# Altium PCB EE311_Example_Boost_PCB.PcbDoc
Units mm, origin at the board's own origin, x right, y up, seen from the top; angles counter-clockwise.
Board outline 52.17 x 39.37 mm, 2 copper layers (Top Layer, Bottom Layer); 43 components, 16 nets, 108 pads, 28 vias.
Unrouted connection lines stored in the file: 1.
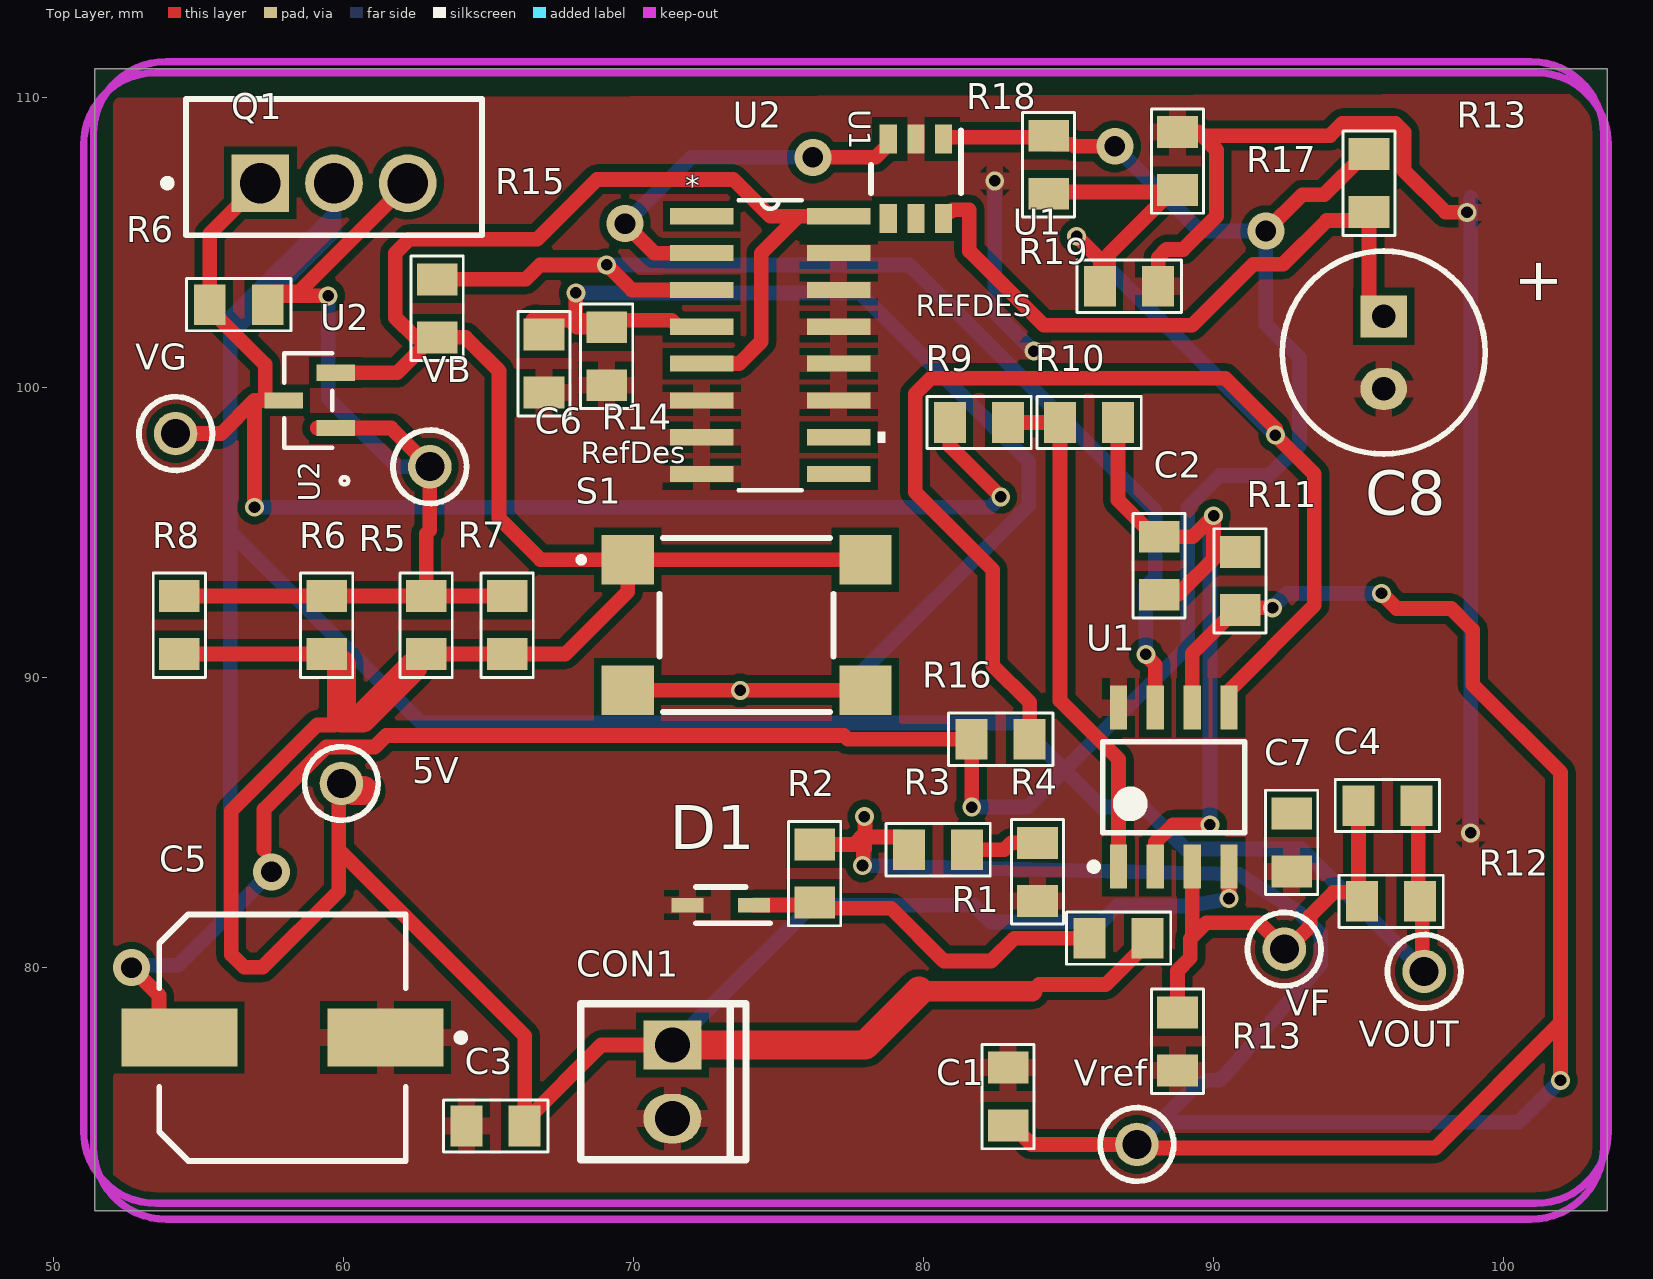
[diagram p0: Top Layer view]
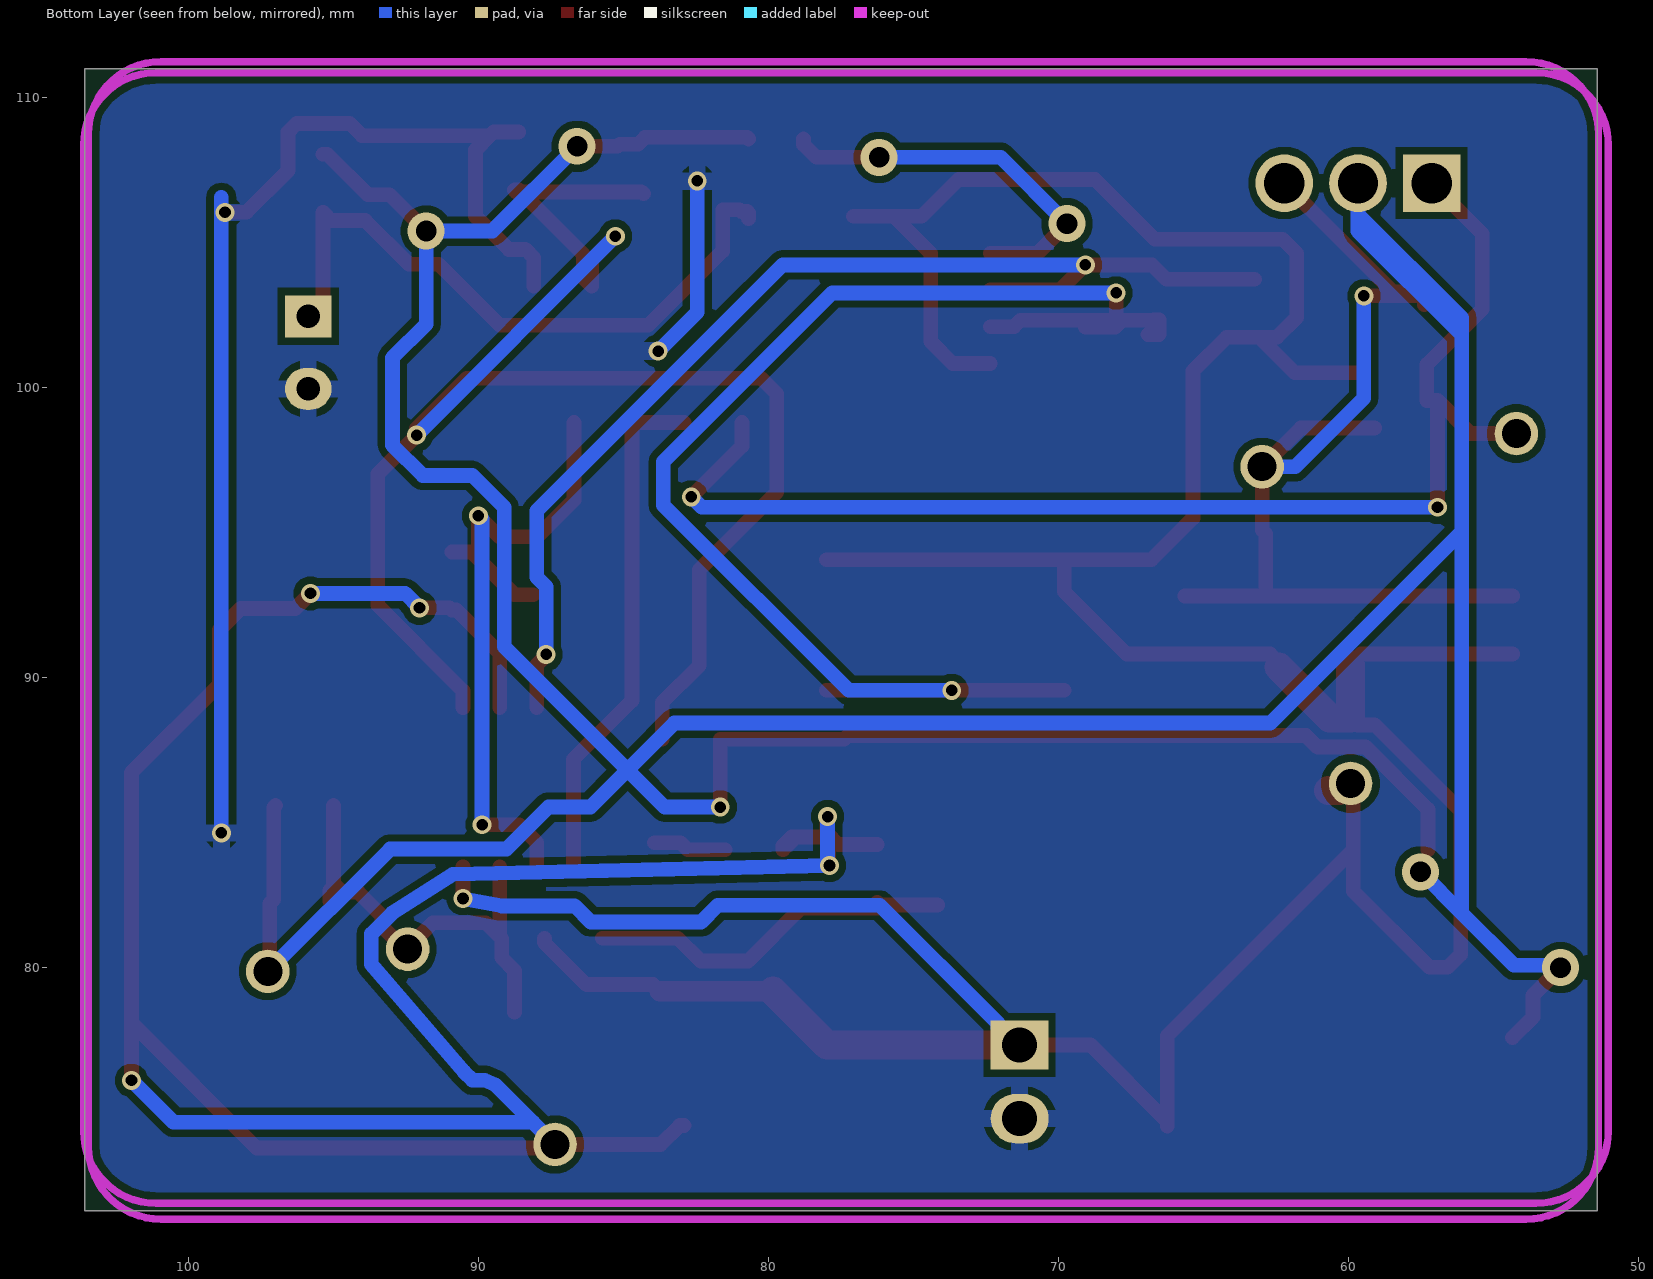
[diagram p1: Bottom Layer view, seen from below]

## Layer stack, top to bottom
Top Solder: solder mask 0.0102, Solder Resist, Dk 3.5
Top Layer: signal copper 0.0356
Dielectric 1: dielectric 0.32, FR-4, Dk 4.8
Bottom Layer: signal copper 0.0356
Bottom Solder: solder mask 0.0102, Solder Resist, Dk 3.5

## Board outline
51.435,71.628 51.435,110.998 103.6,110.998 103.6,71.628

## Design rules (kind name [scope] priority, off if disabled: settings)
BoardOutlineClearance [All] p1: gap=0.3 ignorepadtopadclearanceinfootprint=FALSE except(0.4: Arc-SplitBarrior Arc-SplitContinuation Track-SplitBarrior Track-SplitContinuation SMDPad-SplitBarrior SMDPad-SplitContinuation THPad-SplitBarrior THPad-SplitContinuation Via-SplitBarrior Via-SplitContinuation Fill-SplitBarrior Fill-SplitContinuation Poly-SplitBarrior Poly-SplitContinuation Region-SplitBarrior Region-SplitContinuation Text-SplitBarrior Text-SplitContinuation)
Clearance Clearance_1 [All] p1: gap=0.254 ignorepadtopadclearanceinfootprint=FALSE
Clearance [All] p2: gap=0.381 ignorepadtopadclearanceinfootprint=TRUE
Height [All] p1: minheight=0 maxheight=50 prefheight=12.7
HoleSize [All] p1: absolutevalues=TRUE maxlimit=12 minlimit=0.25 maxpercent=80.000 minpercent=20.000
MinimumAnnularRing [All] p1: minimumring=0.13
MinimumSolderMaskSliver [All] p1: minsoldermaskwidth=0.1
PolygonConnect PolygonConnect_RShunt [InComponent('R5')] p1: connectstyle=Direct reliefconductorwidth=0.508 reliefentries=4 polygonreliefangle="90 Angle" airgapwidth=0.254
PolygonConnect [All] p2: connectstyle=Relief reliefconductorwidth=0.6 reliefentries=4 polygonreliefangle="90 Angle" airgapwidth=0.254
RoutingCorners [All] p1: cornerstyle=Round minsetback=2.54 maxsetback=2.54
RoutingVias [All] p1: holewidth=0.4 width=0.65 viastyle="Through Hole" minholewidth=0.25 minwidth=0.4 maxholewidth=1 maxwidth=2
SilkToSilkClearance [All] p1: silktosilkclearance=0.1
SilkToSolderMaskClearance [IsPad] p1: minsilkscreentomaskgap=0.1 clearancetoexposedcopper=TRUE
SolderMaskExpansion [All] p1: expansion=0.102 istentingtop=FALSE
SupplyNets "Schematic Supply Nets_8" [InNet('VOUT')] p1: voltage=0.000
SupplyNets "Schematic Supply Nets_7" [InNet('Verror')] p2: voltage=0.000
SupplyNets "Schematic Supply Nets_4" [InNet('Von')] p3: voltage=0.000
SupplyNets "Schematic Supply Nets_2" [InNet('Vref1.75')] p4: voltage=0.000
SupplyNets "Schematic Supply Nets_1" [InNet('VOOp')] p5: voltage=0.000
SupplyNets "Schematic Supply Nets_3" [InNet('GND')] p6: voltage=0.000
SupplyNets "Schematic Supply Nets" [InNet('5V')] p7: voltage=0.000
Width [All] p1: maxlimit=10.16 minlimit=0.127 preferedwidth=0.508
24 further rules are at their usual default settings.

## Classes and differential pairs
component class EE311_Example_Boost_Sch: 5V C1 C2 C3 C4 C5 C6 C7 C8 CON1 D1 Q1 R1 R2 R3 R4 R5 R6 R7 R8 R9 R10 R11 R12 R13 R14 R15 R16 R17 R18 R19 S1 U1 U2 VB VF VG VOUT Vref

## Components (designator, comment, footprint, x,y, rotation, side; value= is the part's Value field where it differs from the comment)
5V "5003" TP_TH 59.944,86.36 r0 top
C1 "0.0000000033" "0805 CAP"#1 82.931,75.565 r270 top
C2 "0.0000000033" "0805 CAP"#2 88.138,93.869 r270 top
C3 "0.0000000033" "0805 CAP"#3 65.262,74.549 r0 top
C4 "0.00000033" "0805 CAP"#2 96.012,85.598 r180 top
C5 "EEE-FK1K330P" FP-FKF-MFG 57.912,77.597 r180 top value=33µF
C6 "0.0001" "0805 CAP"#2 66.929,100.838 r270 top
C7 "0.000001" "0805 CAP"#2 92.71,84.328 r90 top
C8 "*" "CAP-RAD-2.5mm Pitch" 95.885,101.219 r270 top
CON1 "HDR2X1" HDR2X1_2P54 71.357,77.343 r0 top
D1 "BZT52C3V3S-TP" SOD2512X115N 73.025,82.169 r180 top
Q1 "IRF4905" IFX-PG-TO220-3-904-1 59.69,107.061 r0 top
R1 "330" "0805 RES" 86.741,81.026 r0 top
R2 "3900" "0805 RES" 76.262,83.254 r90 top
R3 "3300" "0805 RES" 80.518,84.074 r0 top
R4 "1100" "0805 RES" 83.947,83.312 r270 top
R5 "1.8" "0805 RES" 62.865,91.821 r90 top
R6 "100000" "0805 RES" 56.404,102.87 r180 top
R6 "2.2" "0805 RES" 59.436,91.821 r90 top
R7 "100" "0805 RES" 65.659,91.821 r90 top
R8 "100" "0805 RES" 54.356,91.821 r90 top
R9 "1200" "0805 RES" 81.931,98.806 r0 top
R10 "10000" "0805 RES" 85.725,98.806 r180 top
R11 "1200" "0805 RES" 90.932,93.345 r270 top
R12 "1000" "0805 RES" 96.139,82.296 r0 top
R13 "2" "0805 RES" 95.377,107.061 r270 top
R13 "1000" "0805 RES" 88.773,77.47 r90 top
R14 "1000" "0805 RES" 69.088,101.092 r90 top
R15 "1000" "0805 RES" 63.246,102.743 r90 top
R16 "1000" "0805 RES" 82.677,87.884 r0 top
R17 "1000" "0805 RES" 88.773,107.823 r270 top
R18 "1000" "0805 RES" 84.328,107.696 r270 top
R19 "1000" "0805 RES" 87.106,103.505 r0 top
S1 "SWT0315-065025GSA_REVA" SW_SWT0315-065025GSA_REVA 73.914,91.821 r0 top
U1 "LM358DR2G" ONSC-SOIC-8-751-07_V 88.646,86.233 r90 top
U1 "TPS22917DBVR" DBV0006_N 79.756,107.21 r270 top
U2 "CD4043BDR" D16 74.727,101.473 r0 top
U2 "BC807-40,215" SOT23_NEX 58.801,99.568 r90 top
VB "5003" TP_TH 62.992,97.282 r0 top
VF "5003" TP_TH 92.456,80.645 r0 top
VG "5003" TP_TH 54.229,98.425 r0 top
VOUT "5003" TP_TH 97.282,79.883 r90 top
Vref "5003" TP_TH 87.376,73.914 r90 top

## Footprints (in the part's own frame and the unit in brackets; to place one, negate y for a bottom-side part, rotate by r counter-clockwise, add the part's x,y. Pads: shape width x height; smd on the part's side, far side on the other; paste and mask are expansions set on the pad)
"0805 CAP"#1 [mm] "http://www.digikey.co.nz/Web%20Export/Supplier%20Content/Vishay_8026/PDF/VishayBeyschlag_SolderPad.pdf?redirected=1 with dimension G modified by +0.25mm"
  rect 1.1x1.4 smd paste+0 mask+0.102: 1(-1,0)
  rect 1.1x1.4 smd: 2(1,0)
  silkscreen extent -1.8,-0.9 1.8,0.9, body extent -1.04,-0.66 1.04,0.66, height 0.61
"0805 CAP"#2 [mm] "http://www.digikey.co.nz/Web%20Export/Supplier%20Content/Vishay_8026/PDF/VishayBeyschlag_SolderPad.pdf?redirected=1 with dimension G modified by +0.25mm"
  rect 1.1x1.4 smd: 1(-1,0) 2(1,0)
  silkscreen extent -1.8,-0.9 1.8,0.9, body extent -1.04,-0.66 1.04,0.66, height 0.61
"0805 CAP"#3 [mm] "http://www.digikey.co.nz/Web%20Export/Supplier%20Content/Vishay_8026/PDF/VishayBeyschlag_SolderPad.pdf?redirected=1 with dimension G modified by +0.25mm"
  rect 1.1x1.4 smd: 1(-1,0)
  rect 1.1x1.4 smd paste+0 mask+0.102: 2(1,0)
  silkscreen extent -1.8,-0.9 1.8,0.9, body extent -1.04,-0.66 1.04,0.66, height 0.61
"0805 RES" [mm] "http://www.digikey.co.nz/Web%20Export/Supplier%20Content/Vishay_8026/PDF/VishayBeyschlag_SolderPad.pdf?redirected=1 with dimension G modified by +0.25mm"
  rect 1.1x1.4 smd: 1(-1,0) 2(1,0)
  silkscreen extent -1.8,-0.9 1.8,0.9, body extent -1.04,-0.66 1.04,0.66, height 0.61
"CAP-RAD-2.5mm Pitch" [mm] "Cap 6.3 X 11.2"
  rect 1.45x1.6 hole 0.8: 1(-1.25,0)
  oval 1.45x1.6 hole 0.8: 2(1.25,0)
  silkscreen extent -3.5,-3.5 3.5,3.5, body extent -3.15,-3.15 3.15,3.15, height 11.5
D16 [mil]
  rect 86x22 smd: 1(-93,175) 2(-93,125) 3(-93,75) 4(-93,25) 5(-93,-25) 6(-93,-75) 7(-93,-125) 8(-93,-175) 9(93,-175) 10(93,-125) 11(93,-75) 12(93,-25) 13(93,25) 14(93,75) 15(93,125) 16(93,175)
  silkscreen extent -43,-197 156,197, body extent -122,-197 122,197, height 69
DBV0006_N [mm]
  rect 1x0.6 smd paste+0 mask+0: 1(-1.375,0.95) 2(-1.375,0) 3(-1.375,-0.95) 4(1.375,-0.95) 5(1.375,0) 6(1.375,0.95)
  silkscreen extent -1.67,-1.55 0.5,1.55
FP-FKF-MFG [mm]
  rect 4x2 smd paste+0 mask+0: 1(-3.55,0) 2(3.55,0)
  silkscreen extent -6.28,-4.25 4.25,4.25, body extent -5.8,-4.5 5.8,4.5, height 0.25
HDR2X1_2P54 [mm]
  rect 2x1.7 hole 1.2: 1(0,0)
  oval 2x1.7 hole 1.2: 2(0,-2.54)
  silkscreen extent -3.16,-3.96 2.54,1.42, body extent -3.3,-3.64 3.18,1.44, height 10.09
IFX-PG-TO220-3-904-1 [mm] "TO,flange mount,2.54 mm pitch, 3 pin, 10.16 mm L X 4.57 mm W X 20.56 mm H body"
  rect 1.99x1.99 hole 1.39 paste-2539.97 mask+0: 1(-2.54,0)
  round 1.99 hole 1.39 paste-2539.97 mask+0: 2(0,0) 3(2.54,0)
  silkscreen extent -5.87,-1.8 5.1,2.9, body extent -5.16,-1.72 5.16,2.86, height 19.84
ONSC-SOIC-8-751-07_V [mm] "SOIC, 8-Leads, Body 4.9x3.9mm, Pitch 1.27mm"
  rect 1.52x0.6 smd: 1(-2.74,1.905) 2(-2.74,0.635) 3(-2.74,-0.635) 4(-2.74,-1.905) 5(2.74,-1.905) 6(2.74,-0.635) 7(2.74,0.635) 8(2.74,1.905)
  silkscreen extent -2.86,-2.45 1.57,2.88, body extent -3,-2.5 3,2.5, height 1.75
SOD2512X115N [mm]
  rect 1.1x0.5 smd: 1(-1.15,0) 2(1.15,0)
  silkscreen extent -1.7,-0.63 0.85,0.63
SOT23_NEX [mil]
  rect 22x52 smd paste+3.86 mask+4: 1(-37.5,-37.21) 2(37.5,-37.21) 3(0,33.36)
  silkscreen extent -114,-54 64,33, body extent -59,-49 59,49, height 43
SW_SWT0315-065025GSA_REVA [mm]
  rect 1.8x1.7 smd paste+0 mask+0.102: 1(-4.1,2.25) 2(4.1,2.25) 3(-4.1,-2.25) 4(4.1,-2.25)
  silkscreen extent -5.8,-3 3,3
TP_TH [mm] "Test Point, Through Hole, Dia 2.54mm"
  round 1.5 hole 1: 1(0,0)
  silkscreen extent -1.27,-1.27 1.27,1.27, body extent -1.27,-1.27 1.27,1.27, height 4.57

## Part data
5V VB VF VG VOUT Vref: library part TestPoint, "Test Point, Orange, 1-Pin THD, RoHS", Forward Current="3 A", Forward Voltage="1.08 V", Max Operating Temperature="150 degC", Max Surge Current="80 A", Min Operating Temperature="-65 degC", Package Quantity=500, Peak Reverse Current="600 uA", ComponentLink1Description="Manufacturer URL", ComponentLink1URL=http://www.keyelco.com/, ComponentLink2Description=Datasheet, ComponentLink2URL=http://keyelco.com/userAssets/file/M65p56.pdf, DatasheetVersion=Jun-15, Diameter="5.3 mm", Height="0.25 inch", Length="9.5 mm", Mount="Through Hole", PackageDescription="1-Pin Through Hole Device, Dia 2.54 mm", PackageReference=5003, Packaging=Bulk, Pins=2, Radiation Hardening=No, REACH SVHC="No SVHC", RoHSCompliant=true, Weight="0.01 lb", Width="0.25 inch"
C1 C2 C3 C4 C6 C7: library part CerCap_SMT_0805, "SMT ceramic capacitor 0805 size"
C5: library part CMP-001-00000-1, "Aluminum Electrolytic Capacitor, Polarized, Aluminum (wet), 80V, 20% +Tol, 20% -Tol, 33uF, Surface Mount, 3333", Capacitor Type=Aluminium, Case/Package=3333, Manufacturer=Panasonic, Max Operating Temperature=105°C, Min Operating Temperature=-55°C, Component Type=Capacitors, Dielectric Material=Aluminium, Height=10.2mm, Manufacturer Part Number=EEE-FK1K330P, Mounting Technology="Surface Mount", Pins=2, RoHS Compliant=Yes
C8: library part ElecCap_TH_2P0, "Electrolytic capacitor with radial package, 2mm pitch and 5.2mm diameter", LatestRevisionDate=17-Jul-2002, LatestRevisionNote="Re-released for DXP Platform.", PackageDescription="Polarized Capacitor; 2 Leads", PackageReference=POLAR0.8, Published=8-Jun-2000, Publisher="Altium Limited"
CON1: library part CMP-004-000000-7, "Header 2X1", Component Type=Connectors, Design Item ID=HDR2X1, Source=CommonSymbols_V1.SchLib
D1: "Zener Diodes", Manufacturer_Name=MCC, Mouser Part Number=833-BZT52C3V3S-TP, Datasheet Link=https://mccsemi.com/pdf/Products/BZT52C2V0S-BZT52C56S(200mW)(SOD-323).pdf, Geometry.Height=1.15mm, Manufacturer_Part_Number=BZT52C3V3S-TP, Mouser Price/Stock=https://www.mouser.co.uk/ProductDetail/Micro-Commercial-Components-MCC/BZT52C3V3S-TP?qs=ZNK0BnemlqG8WPvv%2FxVbdg%3D%3D
Q1: "OptiMOS - P2 Power-Transistor, P-channel-Enhancement mode, VDS -30V", Manufacturer="Infineon Technologies", Manufacturer Order NumberManufacturer Order Number=IRF4905, PackageReference=PG-TO220-3-904
R1 R2 R3 R4 R5 R6 R6 R7 R8 R9 R10 R11 R12 R13 R13 R14 R15 R16 R17 R18 R19: library part Res_SMT_0805, "0805 resistor", ComponentLink1Description=https://nz.mouser.com/datasheet/2/315/AOA0000C304-1149620.pdf, LatestRevisionDate=17-Jul-2002, LatestRevisionNote="Re-released for DXP Platform.", PackageReference=AXIAL-0.4, Published=8-Jun-2000, Publisher="Altium Limited"
S1: "6mm x 6mm Gull Wing Tactile Switch", Package=None, Check_prices=https://www.snapeda.com/parts/SWT0315-065025GSA/Global+Connector+Technology/view-part/?ref=eda, MF="Global Connector Technology", MP=SWT0315-065025GSA, SnapEDA_Link=https://www.snapeda.com/parts/SWT0315-065025GSA/Global+Connector+Technology/view-part/?ref=snap
U1: library part CMP-014-00017-2, "Single Supply Dual Operational Amplifier, 3 to 32 V, 0 to 70 degC, 8-Pin SOIC, Pb-Free, Tape and Reel", Case/Package=SOIC, Manufacturer="ON Semiconductor", Max Dual Supply Voltage=16V, Max Input Voltage=28.3V, Max Operating Temperature=70°C, Max Supply Voltage=44V, Min Dual Supply Voltage=1.5V, Min Input Voltage=0uV, Min Operating Temperature=0°C, Min Supply Voltage=2.3V, Nominal Dual Supply Voltage=12V, Nominal Supply Current=35uA, Nominal Voltage Gain=100dB, Output Current=40mA, Package Description="8-Pin Small Outline Integrated Circuit, Body 4.9 x 3.9 mm, Pitch 1.27 mm", Package Quantity=2500, Package Reference=SOIC-8-751-07, Channels=2, Common Mode Rejection Ratio=65dB, Datasheet URL=http://www.onsemi.cn/pub_link/Collateral/LM358-D.PDF, Datasheet Version="Rev. 32, 10/2016", Manufacturer URL=http://www.onsemi.com/, Mounting Technology=SM, Nominal Gain Bandwith Product=200KHz, Nominal Supply Voltage=12V, Packaging=TapeandReel, Pins=8, RoHS Compliant=True, Slew Rate=0.07V/us
U1: "5.5-V, 2-A, 80-mÎ© , 10-nA leakage load switch adj. rise time and adj output discharge 6-SOT-23 -40 to 125", Manufacturer_Name="Texas Instruments", Copyright="Copyright (C) 2026 Ultra Librarian. All rights reserved.", Manufacturer_Part_Number=TPS22917DBVR, RefDes=RefDes, Type=TYPE
U2: "CMOS Quad NOR R/S Latch with 3-State Outputs 16-SOIC -55 to 125", Manufacturer_Name="Texas Instruments", Copyright="Copyright (C) 2025 Ultra Librarian. All rights reserved.", Manufacturer_Part_Number=CD4043BDR, RefDes=RefDes, Type=Type
U2: "Description", Manufacturer_Name=Nexperia, Copyright="Copyright (C) 2026 Ultra Librarian. All rights reserved.", Manufacturer_Part_Number=BC807-40,215

## Via types
v1: diameter 0.65, hole 0.4, Top Layer to Bottom Layer, 21 vias
v2: diameter 1.27, hole 0.711, Top Layer to Bottom Layer, 6 vias
v3: diameter 0.65, hole 0.4, Top Layer to Bottom Layer, tented top, 1 vias

## Nets (pads, with @x,y where several pads share a name; then routed paths per layer and width w, separated by ;. In a path a pad name is that pad's centre, name@x,y a point inside that pad or via, vN(x,y) a via of type N, cw(c..) or ccw(c..) an arc to the next point about the centre after c; other vN are vias at no path point)
5V: 5V.1 C3.2 CON1.1 R1.2 R5.1 R6.1@59.436,90.821 R7.1 R8.1 R15.1 S1.1 S1.2 U1.4@90.551,83.493 U2.2@59.746,100.52 U2.5 U2.16 | length 152.2
  Top Layer w0.508: R8.1 59.436,90.821 59.586,90.821 R6.1@59.944,90.463 ; U2.2@59.746,100.52 61.873,100.52 R15.1@63.096,101.743 ; 5V.1 59.848,86.264 59.848,86.11 59.848,84.074 ; 59.944,88.626 59.698,88.38 59.107,88.38 56.144,85.417 56.144,80.467 56.591,80.02 57.222,80.02 59.848,82.647 59.848,84.074 ; R5.1@62.419,90.375 62.419,90.525 62.715,90.821 R5.1 R7.1 67.666,90.821 69.814,92.969 S1.1 ; C3.2 66.262,77.66 59.848,84.074 ; C3.2@66.262,74.699 68.906,77.343 CON1.1 ; U2.5 73.66,100.838 74.422,101.6 74.422,104.648 75.692,105.918 ; U2.16 75.692,105.918 ; S1.2 S1.1 ; 83.769,79.197 83.998,79.426 86.293,79.426 87.741,80.874 R1.2 ; v1(90.551,82.393) U1.4@90.551,83.493 ; R15.1@63.096,101.743 R15.1 64.221,101.743 65.38,100.584 65.38,95.504 66.813,94.071 S1.1 ; R15.1@63.096,101.743 62.484,101.743 61.798,102.429 61.798,104.648 62.28,105.13 66.7,105.13 68.758,107.188 73.457,107.188 74.727,105.918 75.692,105.918
  Top Layer w0.7: 79.858,79.197 83.769,79.197
  Top Layer w1: 5V.1 60.079,86.36 60.329,86.11 60.702,86.11 ; R6.1@59.944,90.463 59.944,88.626 60.67,88.626 R5.1@62.419,90.375 ; CON1.1 78.003,77.343 79.858,79.197
  Bottom Layer w0.508: CON1.1 71.507,77.343 72.103,77.939 72.103,78.089 76.177,82.164 81.76,82.164 82.339,81.585 86.149,81.585 86.703,82.139 89.217,82.139 v1(90.551,82.393)
GND: C1.1 C3.1 C5.1 C6.2 C7.1 C8.2 CON1.2 D1.2 R4.2 R13.1@88.773,76.47 R14.1 R17.1 R19.2 U1.2@79.756,108.585 U1.8 U2.6 U2.7 U2.8 U2.11 U2.12 U2.13 U2.14 U2.15 | length 47.3
  Top Layer w0.508: R19.2 88.106,104.489 88.392,104.775 88.976,104.775 90.119,105.918 90.119,108.204 89.627,108.696 ; R17.1@88.623,108.823 R17.1 89.5,108.823 89.627,108.696 ; v1(98.755,106.054) 98.019,106.054 96.585,107.488 96.585,108.821 96.287,109.119 94.452,109.119 94.029,108.696 89.627,108.696
  Bottom Layer w0.508: v1(82.474,107.137) 82.474,102.616 v1(83.82,101.27) ; v1(98.882,84.658) 98.882,106.562
NetC2_1: C2.1 C2.2 R10.1 R11.1 U1.2@88.011,83.493 | length 25.3
  Top Layer w0.508: R10.1 86.725,96.132 87.988,94.869 C2.1 89.297,94.869 v1(90.018,95.59) 90.018,94.345 ; U1.2@88.011,83.493 88.011,84.328 88.621,84.938 v1(89.891,84.938) ; C2.2 88.773,92.869 90.138,94.234 90.018,94.234 90.018,94.345 ; R11.1 90.018,94.345
  Bottom Layer w0.508: v1(89.891,84.938) v1@89.891,95.479
NetC4_2: C4.2 R12.1 R13.2@88.773,78.47 U1.3@89.281,83.493 VF.1 | length 16.1
  Top Layer w0.508: R13.2@88.773,78.47 88.773,79.907 89.216,80.35 89.216,81.008 89.281,81.073 ; U1.3@89.281,83.493 89.281,81.073 ; C4.2 R12.1@95.012,82.908 ; R12.1 95.139,82.677 95.012,82.804 R12.1@95.012,82.908 ; 89.281,81.073 89.47,81.262 89.768,81.56 91.588,81.56 92.456,80.692 VF.1 92.551,80.645 93.345,81.439 93.345,81.802 94.155,82.612 94.716,82.612 R12.1@95.012,82.908
NetC6_1: C6.1 R14.2 S1.3 S1.4 U2.4 | length 49.4
  Top Layer w0.508: C6.1 66.548,101.838 66.548,102.346 66.751,102.346 66.751,102.33 67.818,102.33 ; v1(68.028,103.276) 68.028,102.33 ; R14.2 68.056,102.092 67.818,102.33 ; S1.3 v1(73.696,89.571) S1.4 ; U2.4 71.552,102.108 71.33,102.33 68.028,102.33 ; 67.818,102.33 68.028,102.33
  Bottom Layer w0.508: v1(68.028,103.276) 77.815,103.276 83.642,97.449 83.642,95.961 77.252,89.571 v1(73.696,89.571)
NetC8_1: C8.1 R13.2@95.377,106.061 U1.6@80.706,105.835 | length 22.8
  Top Layer w0.508: U1.6@80.706,105.835 80.706,106.035 80.752,106.081 80.952,106.081 81.014,106.143 81.595,106.143 81.595,104.724 82.28,104.039 84.16,102.159 89.281,102.159 91.389,104.267 92.411,104.267 93.915,105.771 95.087,105.771 95.377,106.061 95.377,102.94 95.848,102.469 C8.1
NetD1_1: D1.1 R1.1 R2.1 | length 12.7
  Top Layer w0.508: D1.1 74.179,82.173 76.181,82.173 R2.1 ; R2.1@76.262,82.058 78.902,82.058 80.72,80.239 82.356,80.239 83.142,81.026 R1.1
NetQ1_3: Q1.3 R5.2 R6.1@57.404,102.87 R6.2@59.436,92.821 R7.2 R8.2 U2.1@59.746,98.615 VB.1 | length 37.2
  Top Layer w0.508: R8.2 59.436,92.821 R5.2 ; R6.1@57.404,102.87 R6.1@57.404,103.02 ; U2.1@59.111,98.615 59.746,98.615 61.658,98.615 VB.1 62.992,95.098 62.865,94.971 R5.2 ; v1(59.487,103.175) R6.1@57.559,103.175 ; Q1.3 58.485,103.316 57.7,103.316 R6.1@57.559,103.175 ; R7.2 R5.2 ; R6.1@57.404,103.02 R6.1@57.559,103.175 ; R6.1@57.404,103.02 57.404,103.175 R6.1@57.559,103.175
  Bottom Layer w0.508: v1(59.487,103.175) 59.487,99.644 61.849,97.282 VB.1
NetR3_2: R3.2 R4.1 | length 2.5
  Top Layer w0.508: R3.2 82.804,84.074 83.042,84.312 R4.1
NetR9_2: R9.2 R10.2 U1.1@86.741,83.493 | length 17.6
  Top Layer w0.508: R9.2 R10.2@84.379,98.806 ; R10.2 84.725,89.211 86.741,87.195 U1.1@86.741,83.493
NetR16_2: R16.2 R17.2 R18.2 R19.1 U1.5@90.551,88.973 | length 59.1
  Top Layer w0.508: R16.2 83.677,89.154 82.407,90.424 82.407,93.729 79.731,96.406 79.731,99.797 80.264,100.33 90.424,100.33 92.151,98.603 v1(92.151,98.374) 93.493,97.032 93.493,92.503 90.551,89.56 U1.5@90.551,88.973 ; R18.2 84.391,106.76 R17.2@88.559,106.76 ; v1(85.293,105.232) 86.106,104.419 R19.1 86.402,103.801 86.402,104.602 R17.2@88.559,106.76 ; R17.2@88.559,106.76 88.623,106.823 R17.2 88.709,106.76 R17.2@88.559,106.76
  Bottom Layer w0.508: v1(85.293,105.232) v1(92.151,98.374)
Verror: R15.2 U1.7 U2.3@72.365,103.378 | length 39.2
  Top Layer w0.508: R15.2 66.295,103.743 66.793,104.241 v1(69.088,104.241) 69.952,103.378 U2.3@72.365,103.378 ; v1(87.683,90.813) 87.683,90.778 88.011,90.45 U1.7
  Bottom Layer w0.508: v1(69.088,104.241) 79.527,104.242 88.011,95.758 88.011,93.469 87.683,93.141 v1(87.683,90.813)
Von: U1.3@78.806,108.585 U2.2@72.365,104.648 | length 13.5
  Top Layer w0.508: v2(69.723,105.664) 70.739,104.648 U2.2@72.365,104.648 ; v2(76.2,107.95) 78.371,107.95 78.806,108.385 U1.3@78.806,108.585
  Bottom Layer w0.508: v2(69.723,105.664) 72.009,107.95 v2(76.2,107.95)
VOOp: Q1.1 R6.2@55.404,102.87 R9.1 U2.3@57.954,99.568 VG.1 | length 45.4
  Top Layer w0.508: VG.1 55.795,98.425 56.938,99.568 56.947,99.568 ; v1(56.947,95.885) 56.947,99.568 ; Q1.1 55.404,105.315 55.404,102.87 55.404,102.72 57.319,100.805 57.319,99.568 56.947,99.568 ; R9.1 80.931,97.987 v1(82.677,96.241)
  Bottom Layer w0.508: v1(56.947,95.885) 82.321,95.885 v1(82.677,96.241)
VOUT: C4.1 C5.2 Q1.2 R12.2 R13.1@95.377,108.061 R16.1 R18.1 U1.1@80.706,108.585 VOUT.1 | length 168.4
  Top Layer w0.508: v2(52.705,80.01) 53.654,79.061 53.654,78.306 C5.2 ; 57.277,84.073 57.277,85.472 59.423,87.618 61.088,87.618 61.481,88.011 77.272,88.011 77.399,87.884 R16.1 v1(81.677,85.547) ; U1.1@80.706,108.585 80.706,108.594 80.752,108.641 84.273,108.641 84.513,108.4 85.148,108.4 85.217,108.331 v2(86.614,108.331) ; v2(91.821,105.41) 93.071,106.66 93.826,106.66 95.227,108.061 R13.1@95.377,108.061 ; C4.1 97.075,85.534 97.075,82.359 R12.2 97.211,82.225 97.211,79.955 VOUT.1
  Bottom Layer w0.508: v2(52.705,80.01) 52.784,80.089 54.308,80.089 56.109,81.89 ; v2(57.531,83.312) 56.109,81.89 ; Q1.2 59.69,105.994 ; v1(81.677,85.547) 83.595,85.547 89.129,91.081 89.129,95.879 90.232,96.982 91.937,96.982 92.984,98.029 92.984,101.035 91.821,102.198 v2(91.821,105.41) 89.535,105.41 v2(86.614,108.331) ; VOUT.1 93.066,84.099 89.052,84.099 87.605,85.547 86.157,85.547 83.261,88.443 62.713,88.443 56.109,95.047 ; 56.109,81.89 56.109,95.047 ; 56.109,95.047 56.109,101.829 ; 56.109,101.829 56.109,102.413 59.69,105.994 ; 56.109,101.829 59.69,105.41 59.69,105.994
Vref1.75: C1.2 R2.2 R3.1 R11.2 U1.6@89.281,88.973 Vref.1 | length 99.5
  Top Layer w0.508: R2.2 77.615,84.254 77.978,84.617 77.978,84.112 77.94,84.075 77.94,83.583 v1@77.902,83.545 ; v1(77.978,85.217) 78.005,85.19 78.005,84.593 78.086,84.512 R3.1@79.222,84.512 ; C1.2 83.081,74.565 83.732,73.914 Vref.1 ; Vref.1@87.376,73.787 97.663,73.787 101.981,78.105 ; U1.6@89.281,88.973 89.281,90.844 90.782,92.345 R11.2 91.003,92.416 v1(92.05,92.416) ; v1(95.809,92.913) 96.328,92.394 98.215,92.394 98.959,91.65 98.959,89.763 101.981,86.741 101.981,78.105 ; v3(101.981,76.124) 101.981,78.105 ; R3.1@79.222,84.512 79.222,84.37 R3.1 79.518,84.216 R3.1@79.222,84.512
  Bottom Layer w0.508: v1(77.978,85.217) 77.978,83.598 v1(77.913,83.533) 90.896,83.226 92.977,81.903 93.714,81.166 93.714,80.124 90.518,76.421 90.221,76.124 89.8,76.124 89.437,75.975 88.138,74.676 ; Vref.1 88.138,74.676 ; v1(92.05,92.416) 92.547,92.913 v1(95.809,92.913) ; v3(101.981,76.124) 100.533,74.676 88.138,74.676
pads on no net: C7.2 U1.4@78.806,105.835 U1.5@79.756,105.835 U2.1@72.365,105.918 U2.9 U2.10

## Polygon pours and split planes (outlines as drawn)
GND on Bottom Layer "23" (solid, pour order 2): 51.562,110.744 51.435,110.617 51.435,72.009 103.251,72.009 103.124,72.136 103.124,110.871
GND on Top Layer "23" (solid, pour order 0): 52.077,110.011 52.077,71.276 51.846,71.276 103.281,71.276 103.281,110.011 103.154,110.138

## Keep-outs
Keep-Out Layer:
  lines w0.254: 51.054,74.382 ccw(c53.554,74.382) 53.554,71.882 101.132,71.882 ccw(c101.132,74.382) 103.632,74.382 103.632,108.371 ccw(c101.132,108.371) 101.132,110.871 53.554,110.871 ccw(c53.554,108.371) 51.054,108.371 51.054,74.382 ; 51.395,73.835 ccw(c53.895,73.835) 53.895,71.335 100.965,71.335 ccw(c100.965,73.835) 103.465,73.835 103.465,108.752 ccw(c100.965,108.752) 100.965,111.252 53.895,111.252 ccw(c53.895,108.752) 51.395,108.752 51.395,73.835

## Text inside footprints (layer, text, board x,y; h text height)
C8: Top Overlay "+" at 100.584,104.521 h1.5 r270
U2: Top Overlay "RefDes" at 68.199,97.155 h1.27; Top Overlay "*" at 71.793,106.35 h1.27; Top Overlay "REFDES" at 79.756,102.235 h1.27; Top 3D Body "RefDes2" at 72.504,100.838 h1.27; Top 3D Body "*" at 71.793,106.35 h1.27